# Altium PCB SMPS.PcbDoc
Units mm, origin at the board's own origin, x right, y up, seen from the top; angles counter-clockwise.
Board outline 45.21 x 35.05 mm, 2 copper layers (Top Layer, Bottom Layer); 18 components, 13 nets, 62 pads, 61 vias.
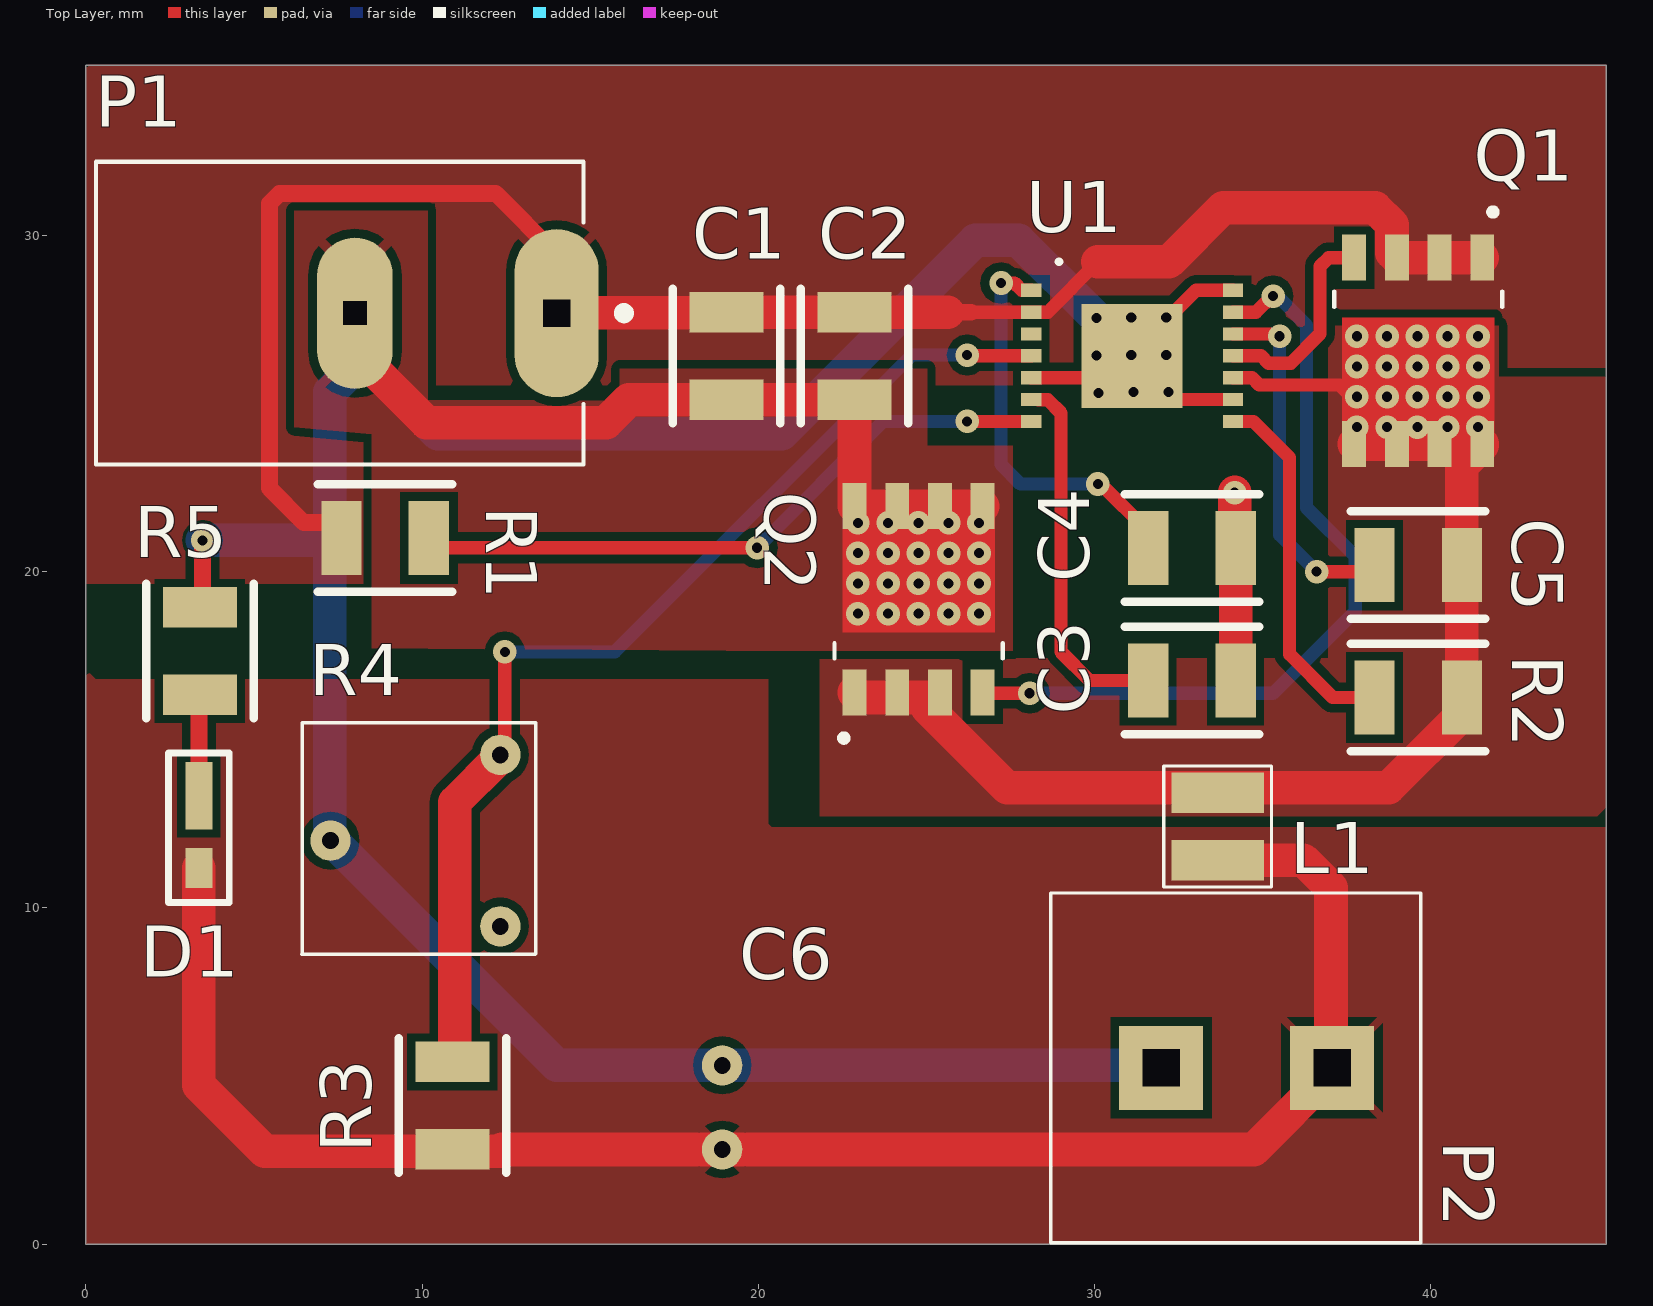
[diagram p0: Top Layer view]
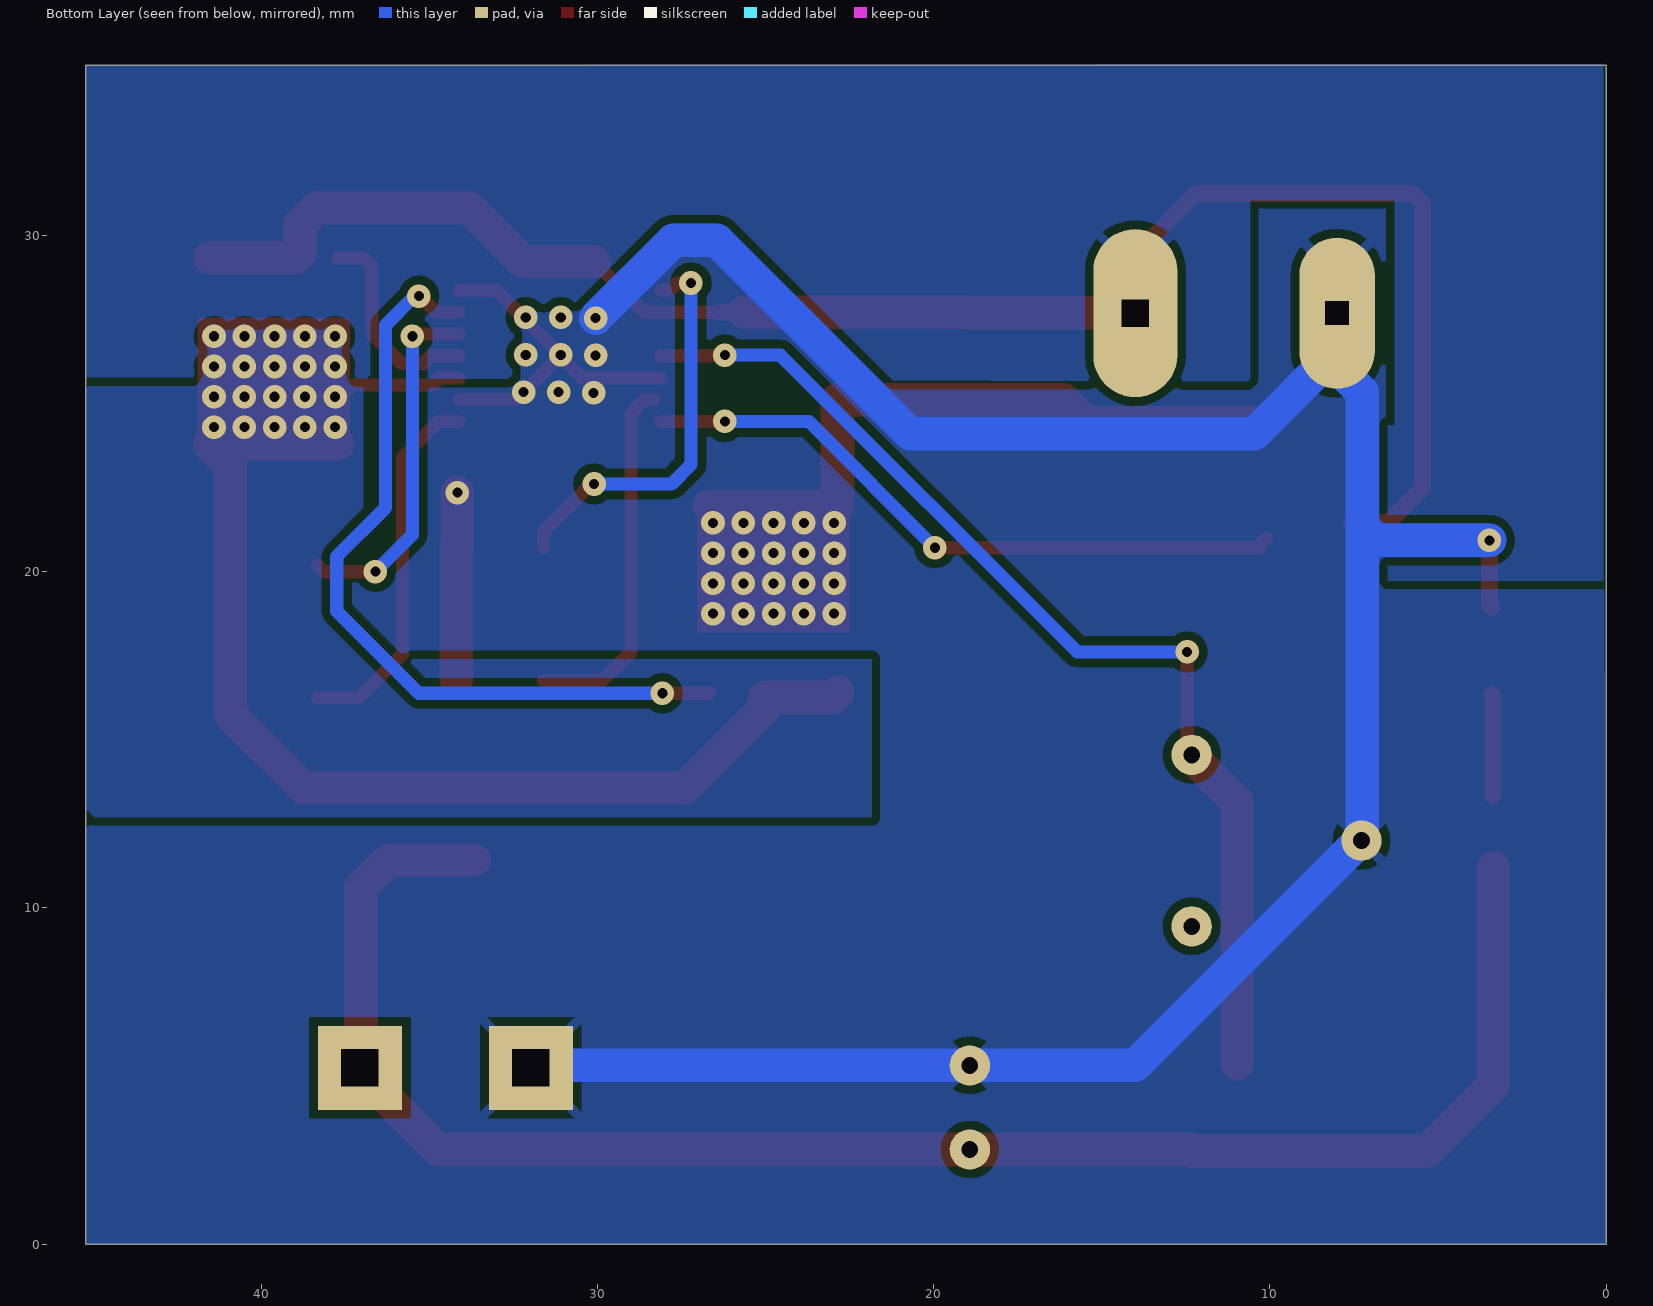
[diagram p1: Bottom Layer view, seen from below]
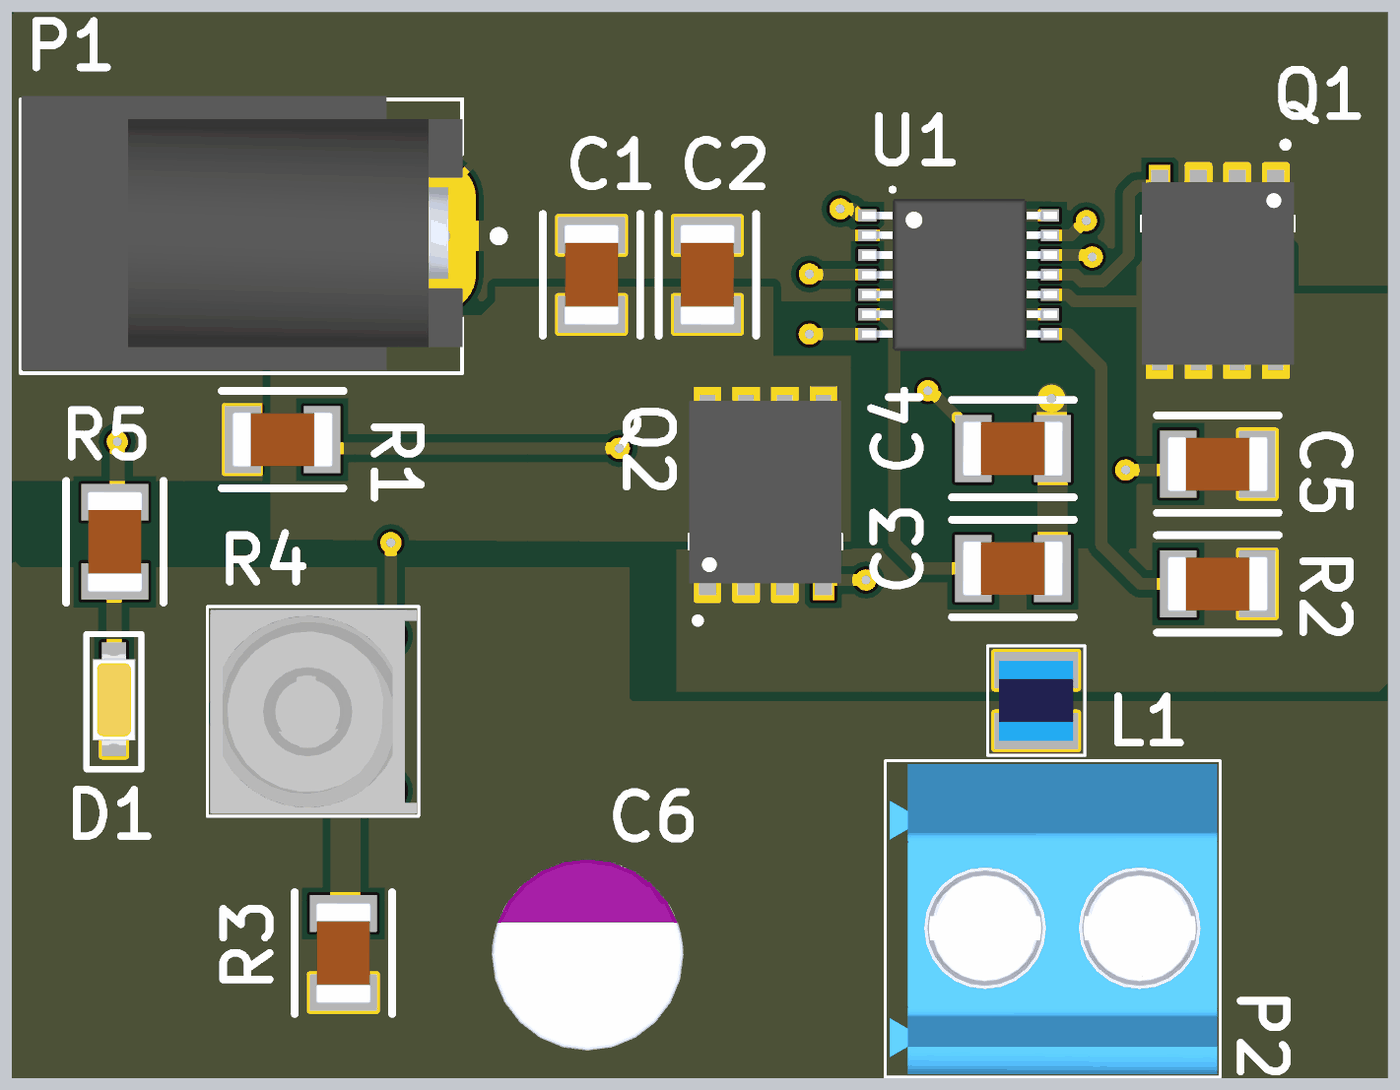
[diagram p2: 3D render of the assembled board from above, using the file's embedded part models]

## Layer stack, top to bottom
Top Solder: solder mask 0.0102, Solder Resist, Dk 3.5
Top Layer: signal copper 0.0356
Dielectric 1: dielectric 0.32, FR-4, Dk 4.8
Bottom Layer: signal copper 0.0356
Bottom Solder: solder mask 0.0102, Solder Resist, Dk 3.5

## Board outline
0,0 45.212,0 45.212,35.052 0,35.052

## Design rules (kind name [scope] priority, off if disabled: settings)
Clearance Clearance_1 [All] p1: gap=0.254 ignorepadtopadclearanceinfootprint=FALSE except(0: Arc-Hole Track-Hole SMDPad-Hole THPad-Hole Via-Hole Fill-Hole Poly-Hole Region-Hole Text-Hole)
ComponentClearance [All] p1: gap=0.254 collisioncheckmode=3 verticalgap=2540 showdistances=FALSE
HoleSize [All] p1: absolutevalues=TRUE maxlimit=3.5 minlimit=0.3 maxpercent=80.000 minpercent=20.000
MinimumAnnularRing [All] p1: minimumring=0.2
PolygonConnect GND_HeatSink [InNet('GND') vs InNet('GND')] p1: thpad.connectstyle=Relief thpad.reliefconductorwidth=0.3 thpad.reliefentries=4 thpad.polygonreliefangle="45 Angle" thpad.airgapwidth=0.254 smdpad.connectstyle=Direct smdpad.reliefconductorwidth=0.254 smdpad.reliefentries=4 smdpad.polygonreliefangle="90 Angle" smdpad.airgapwidth=0.254 via.connectstyle=Direct via.reliefconductorwidth=0.254 via.reliefentries=4 via.polygonreliefangle="90 Angle" via.airgapwidth=0.254
PolygonConnect NetC5_1_HeatSink [InNet('NetC5_1') vs InNet('NetC5_1')] p2: connectstyle=Direct reliefconductorwidth=0.254 reliefentries=4 polygonreliefangle="90 Angle" airgapwidth=0.254
PolygonConnect [All] p3: thpad.connectstyle=Relief thpad.reliefconductorwidth=0.254 thpad.reliefentries=4 thpad.polygonreliefangle="45 Angle" thpad.airgapwidth=0.254 smdpad.connectstyle=Direct smdpad.reliefconductorwidth=0.254 smdpad.reliefentries=4 smdpad.polygonreliefangle="90 Angle" smdpad.airgapwidth=0.254 via.connectstyle=Relief via.reliefconductorwidth=0.254 via.reliefentries=4 via.polygonreliefangle="90 Angle" via.airgapwidth=0.254
RoutingVias [All] p1: holewidth=0.4 width=0.8 viastyle="Through Hole" minholewidth=0.3 minwidth=0.7 maxholewidth=0.5 maxwidth=0.9
SolderMaskExpansion [All] p1: expansion=0.102
UnRoutedNet [All] p1: checkbadconnections=TRUE
UnpouredPolygon [All] p1: allowunpoured=TRUE allowshelved=TRUE
Width [All] p1: maxlimit=1 minlimit=0.2 preferedwidth=0.5
26 further rules are at their usual default settings.

## Components (designator, comment, footprint, x,y, rotation, side; value= is the part's Value field where it differs from the comment)
C1 "10uF" 1206 19.05,26.416 r90 top
C2 "0.1uF" 1206 22.86,26.416 r90 top
C3 "10uF" 1206 32.893,16.764 r180 top
C4 "2.2uF" 1206 32.893,20.701 r0 top
C5 "470nF" 1206 39.624,20.193 r180 top
C6 "4700uF" 2SEPC390M+TSS 18.923,4.064 r90 top
D1 "158301260" LED 3.36,12.26 r180 top
L1 "4.7uH" LQW2UAS4R7J00L 33.66,12.42 r270 top
P1 "PJ-037AH" power 14.001,27.686 r180 top
P2 "102-6179-ND" Output 39.6,0.14 r90 top
Q1 "CSD18540Q5B" CSD18540Q5B 39.624,26.567 r270 top
Q2 "CSD18540Q5B" CSD18540Q5B 24.765,19.177 r90 top
R1 "140KΩ" 1206 8.9,21 r180 top
R2 "140KΩ" 1206 39.624,16.256 r0 top
R3 "75kΩ" 1206 10.9,4.12 r270 top
R4 "20kΩ" TOP_ADJ 9.8,12 r0 top
R5 "330Ω" 1206 3.39,17.64 r270 top
U1 "LM3150MH/NOPB" LM3150MH/NOPB 31.115,26.416 r0 top

## Footprints (in the part's own frame and the unit in brackets; to place one, negate y for a bottom-side part, rotate by r counter-clockwise, add the part's x,y. Pads: shape width x height; smd on the part's side, far side on the other; paste and mask are expansions set on the pad)
2SEPC390M+TSS [mm]
  round 1.2 hole 0.5: 1(-1.25,0) 2(1.25,0)
  body extent -3.15,-3.15 3.15,3.15, height 14
1206 [mm]
  rect 1.2x2.2 smd: 1(-1.3,0) 2(1.3,0)
  silkscreen extent -2,-1.6 2,1.6, body extent -1.65,-0.9 1.65,0.9, height 1.6
CSD18540Q5B [mm]
  rect 1.372x0.71 smd paste-2: 1(-2.77,-1.905) 2(-2.77,1.905) 2(-2.77,-0.635) 2(-2.77,0.635)
  rect 1.372x0.71 smd paste-2 mask+0: 3(2.77,1.905) 3(2.77,-0.635) 3(2.77,0.635) 3(2.77,-1.905)
  Top Layer region: 2.866,-2.26 -0.984,-2.26 -0.984,2.26 2.866,2.26
  silkscreen extent -4.23,-2.5 -1.3,2.5, body extent -2.9,-2.5 3.1,2.5, height 1.05
LED [mm] "158301260"
  rect 0.8x2 smd: 1(0,-1.075)
  rect 0.8x1.2 smd: 2(0,1.075)
  silkscreen extent -0.9,-2.34 0.9,2.1, body extent -0.7,-1.69 0.7,1.31, height 0.8
LM3150MH/NOPB [mm]
  rect 0.6x0.395 smd: 1(-3,1.95) 2(-3,1.3) 3(-3,0.65) 4(-3,0) 5(-3,-0.65) 5(3,-1.3) 6(-3,-1.3) 7(-3,-1.95) 8(3,-1.95) 10(3,-0.65) 11(3,0) 12(3,0.65) 13(3,1.3) 14(3,1.95)
  rect 3x3.1 smd: 15(0,0)
  silkscreen extent -2.18,2.8 -2.17,2.8, body extent -3.17,-2.5 3.23,2.5, height 1.2
LQW2UAS4R7J00L [mm]
  rect 1.2x2.75 smd: 1(-1,0) 2(1,0)
  silkscreen extent -1.8,-1.6 1.8,1.6, body extent -1.31,-1.22 1.31,1.23, height 2.03
Output [mm] "102-6179-ND"
  rect 2.5x2.5 hole 1.1 square: 1(5.1,2.54) 2(5.1,7.62)
  silkscreen extent -0.1,-0.1 10.3,10.9, body extent 0,0 10.2,10.76, height 14.1
power [mm] "PJ-037AH"
  oval 2.5x5 hole 0.8 square: 1(0,0)
  oval 2.25x4.5 hole 0.7 square: 2(6,0)
  silkscreen extent -2.15,-4.5 13.7,4.5, body extent -0.82,-4.6 13.68,4.4, height 12
TOP_ADJ [mm] "3360Y-1-503LF"
  round 1.2 hole 0.5: 1(2.525,2.55) 2(-2.525,0) ""(2.525,-2.55)
  silkscreen extent -3.37,-3.38 3.57,3.51, body extent -3.27,-3.3 3.51,3.41, height 18.56

## Part data
C1 C3: library part Capacitor, "CAP CER 10UF 25V X5R 1206", MF="AVX Corporation", PN=12063D106KAT2A
C2: library part Capacitor, "CAP CER 0.1UF 50V X7R 1206", MF="AVX Corporation", PN=12065C104KAT2A
C4: library part Capacitor, "CAP CER 2.2UF 25V X7R 1206", MF="AVX Corporation", PN=12063C225K4Z2A
C5: library part Capacitor, "CAP CER 0.47UF 50V Z5U 1206", MF="AVX Corporation", PN=12065E474MAT2A
C6: library part 2SEPC390M+TSS, "CAP ALUM POLY 390UF 20% 2.5V T/H", MF="Panasonic Electronic Components", PN=2SEPC390M+TSS
D1: library part LED158301260, "LED WL-SWTP COOL WHT 6000K 1206", MF="Würth Elektronik", PN=158301260
L1: library part Inductor, "FIXED IND 4.7UH 260MA 4 OHM SMD", MF="Murata Electronics", PN=LQW2UAS4R7J00L
P1: library part Power_connector, "CONN PWR JACK 2X5.5MM SOLDER", MF="CUI Devices", PN=PJ-037AH
P2: library part Output, "TERMINAL BLOCK, SCREW TYPE, 5.08", MF="CUI Devices", PN=TB004-508-02BE
Q1 Q2: "MOSFET N-CH 60V 100A 8VSON", MF="Texas Instruments", PN=CSD18540Q5B
R1 R2: library part Resistor, "RES SMD 140K OHM 0.5% 1/4W 1206", MF=YAGEO, PN=RT1206DRD07140KL
R3: library part Resistor, "RES SMD 75K OHM 0.5% 1/4W 1206", MF=YAGEO, PN=RT1206DRD0775KL
R4: library part "Variable Resistor", "POT 50K OHM 1/4W PLASTIC LINEAR", MF="Bourns Inc.", PN=3360Y-1-503LF
R5: library part Resistor, "RES SMD 330 OHM 0.5% 1/4W 1206", MF=YAGEO, PN=RT1206DRE07330RL
U1: "IC REG CTRLR BUCK 14TSSOP", MF="Texas Instruments", PN=LM3150MH/NOPB

## Via types
v1: diameter 0.7, hole 0.3, Top Layer to Bottom Layer, 61 vias

## Nets (pads, with @x,y where several pads share a name; then routed paths per layer and width w, separated by ;. In a path a pad name is that pad's centre, name@x,y a point inside that pad or via, vN(x,y) a via of type N, cw(c..) or ccw(c..) an arc to the next point about the centre after c; other vN are vias at no path point)
+5: C6.1 D1.2 L1.2 P2.1 R3.2 | length 51.1
  Top Layer w1: D1.2 3.36,4.72 5.316,2.764 12.319,2.764 12.369,2.814 C6.1 34.734,2.814 37.03,5.11 37.03,10.6 36.21,11.42 L1.2
+12: C1.2 C2.2 P1.1 Q1.2 R1.2 U1.2 | length 52.1
  Top Layer w0.395: 26.319,27.716 U1.2 28.605,27.716 30.099,29.21
  Top Layer w0.5: R1.2@7.59,21.463 6.477,21.463 5.461,22.479 5.461,30.949 5.754,31.242 12.192,31.242 14.001,29.433 P1.1 ; 25.624,27.716 26.319,27.716
  Top Layer w1: P1.1 14.016,27.701 19.035,27.701 C1.2 C2.2 25.624,27.716 ; 30.099,29.21 32.21,29.21 33.821,30.82 38.343,30.82 38.844,30.319 38.844,29.482 38.989,29.337 40.259,29.337 Q1.2@41.529,29.337
GND: C1.1 C2.1 C3.1 C4.2 C6.2 P1.2 P2.2 Q2.3 R4.2 R5.1 U1.5 U1.14 U1.15 | length 116.2
  Top Layer w0.395: U1.5@28.115,25.766 30.465,25.766 U1.15 ; U1.5@34.115,25.116 32.415,25.116 v1(32.194,25.336) U1.15 ; U1.14 33.015,28.366 31.115,26.466 U1.15
  Top Layer w0.5: R5.1 3.47,19.02 v1(3.47,20.93)
  Top Layer w1: P1.2 8.001,26.561 10.13,24.432 15.468,24.432 16.152,25.116 C1.1 C2.1 22.86,21.947 24.13,21.947 25.4,21.947 Q2.3@26.67,21.947 ; v1(34.163,22.352) 34.163,20.731 C4.2 C3.1
  Bottom Layer w1: v1(3.47,20.93) 6.884,20.93 7.254,21.3 ; P1.2 P1.2@8.001,26.561 ; v1(30.05,27.54) 27.74,29.85 26.45,29.85 20.7,24.1 10.462,24.1 P1.2@8.001,26.561 ; P2.2@31.95,5.11 31.746,5.314 C6.2 14.005,5.314 7.254,12.065 7.254,21.3 ; 7.254,21.3 7.254,25.34 8.001,26.087 P1.2@8.001,26.561
  other v1: 22.96,18.75 23.86,18.75 24.76,18.75 25.66,18.75 26.562,18.75 22.96,19.65 23.86,19.65 24.76,19.65 25.66,19.65 26.562,19.65 22.96,20.55 23.86,20.55 24.76,20.55 25.66,20.55 26.562,20.55 22.96,21.45 23.86,21.45 24.76,21.45 25.66,21.45 26.562,21.45 30.114,25.318 31.154,25.336 30.05,26.429 31.091,26.448 32.131,26.448 31.09,27.559 32.131,27.559
NetC3_2: C3.2 U1.6 | length 10.9
  Top Layer w0.395: U1.6@28.321,25.115 28.602,25.115 29,24.717 29,17.609 29.845,16.764 C3.2
NetC4_1: C4.1 U1.1 | length 12.1
  Top Layer w0.395: v1(27.217,28.583) 27.617,28.583 27.834,28.366 U1.1 ; v1(30.099,22.606) 30.188,22.606 31.593,21.201 C4.1
  Bottom Layer w0.395: v1(27.217,28.583) 27.217,23.183 27.794,22.606 v1(30.099,22.606)
NetC5_1: C5.1 L1.1 Q1.3 Q2.2 R2.2 U1.10 | length 37.6
  Top Layer w0.395: U1.10 34.683,25.766 34.899,25.549 37.287,25.549 37.719,25.117 37.719,24.3 Q1.3@37.719,23.797
  Top Layer w1: Q2.2@22.86,16.407 22.86,16.401 23.005,16.256 24.13,16.256 25.019,16.256 25.019,15.951 27.397,13.573 32.258,13.573 38.741,13.573 40.924,15.756 R2.2 C5.1 40.924,23.151 41.529,23.756 41.529,23.797 40.259,23.797 38.989,23.797 Q1.3@37.719,23.797
  other v1: 37.8,24.3 38.7,24.3 39.6,24.3 40.5,24.3 41.402,24.3 37.8,25.2 38.7,25.2 39.6,25.2 40.5,25.2 41.402,25.2 37.8,26.1 38.7,26.1 39.6,26.1 40.5,26.1 41.402,26.1 37.8,27 38.7,27 39.6,27 40.5,27 41.402,27
NetC5_2: C5.2 U1.12 | length 10.7
  Top Layer w0.395: U1.12 35.434,27.066 v1(35.5,27) ; v1(36.6,20) 38.131,20 C5.2
  Bottom Layer w0.395: v1(35.5,27) 35.5,21.1 v1(36.6,20)
NetD1_1: D1.1 R5.2 | length 3
  Top Layer w0.5: D1.1 3.36,16.31 R5.2
NetQ1_1: Q1.1 U1.11 | length 6.2
  Top Layer w0.395: U1.11 34.951,26.416 35.168,26.198 35.832,26.198 36.703,27.07 36.703,29.083 36.957,29.337 Q1.1
NetQ2_1: Q2.1 U1.13 | length 23.9
  Top Layer w0.395: Q2.1 26.694,16.383 v1(28.067,16.383) ; U1.13 34.797,27.716 35.275,28.194 v1(35.306,28.194)
  Bottom Layer w0.395: v1(28.067,16.383) 35.306,16.383 37.747,18.824 37.747,20.451 36.302,21.897 36.302,27.332 35.439,28.194 v1(35.306,28.194)
NetR1_1: R1.1 U1.7 | length 19.7
  Top Layer w0.395: R1.1@10.1,21 10.3,20.8 10.3,20.71 v1(19.96,20.71) ; v1(26.207,24.466) U1.7
  Bottom Layer w0.395: v1(19.96,20.71) 23.716,24.466 v1(26.207,24.466)
NetR2_1: R2.1 U1.8 | length 11
  Top Layer w0.395: U1.8 34.716,24.466 35.798,23.384 35.798,17.542 37.084,16.256 R2.1
NetR3_1: R3.1 R4.1 U1.4 | length 32.5
  Top Layer w0.395: R4.1@12.304,14.615 12.09,14.615 12.46,14.985 v1(12.46,17.61) ; v1(26.21,26.44) 26.233,26.417 28.112,26.417 U1.4 U1.4
  Top Layer w1: R3.1@10.971,5.371 10.971,13.142 12.304,14.475 R4.1@12.304,14.615
  Bottom Layer w0.395: v1(12.46,17.61) 15.727,17.61 24.557,26.44 v1(26.21,26.44)
pads on no net: R4. U1.3

## Polygon pours and split planes (outlines as drawn)
+5 on Top Layer "+5_L01_P044" (solid, remove dead copper, pour order 44): 45.2,0 45.2,12.4 20.4,12.4 20.3,12.5 20.3,16.8 0.3,16.8 0,17.1 0,0
GND on Top Layer "GND_L01_P004" (solid, remove dead copper, pour order 4): 6.2,31 10.16,31 10.16,29.083 10.16,25.1 15.875,25.082 15.875,26.035 25.019,26.035 25.019,23.749 27.559,23.749 27.559,17.653 21.59,17.653 19.05,17.653 8.509,17.716 8.509,24.086 6.2,24.3
+12 on Top Layer "+12_L01_P040" (solid, remove dead copper, pour order 40): 45.212,35.075 45.212,25.623 10.572,25.623 10.572,31.023 6.272,31.023 6.272,24.323 8.454,24.323 8.454,19.708 5.787,19.708 0.072,19.708 0.072,22.883 0.072,35.075
+12 on Top Layer "+12_L01_P032" (solid, remove dead copper, pour order 32): 45.1,35 45.1,25.548 10.388,25.548 10.388,30.948 6.088,30.948 6.088,24.248 8.27,24.248 8.27,19.633 5.603,19.633 0,19.633 0,35
NetC5_1 on Top Layer "NETC5_1_L01_P018" (solid, remove dead copper, pour order 18): 36.945,27.319 42.025,27.319 42.025,25.8 45.2,25.8 45.2,12.973 44.946,12.719 21.832,12.719 21.832,17.418 36.945,17.418
+12 on Top Layer "+12_L01_P008" (solid, remove dead copper, pour order 8): 3.429,20.447
GND on Bottom Layer "GND_L02_P050" (solid, remove dead copper, pour order 50): 0.088,35.1 45.164,35.1 45.212,35.052 45.2,35.04 45.2,0 0,0
+12 on Bottom Layer "+12_L02_P006" (solid, remove dead copper, pour order 6): 45.212,35.052 45.212,25.781 10.588,25.648 10.588,31.048 6.288,31.048 6.288,24.348 8.47,24.348 8.47,19.733 5.803,19.733 0.088,19.733 0.088,22.908 0.088,35.1
NetC5_1 on Bottom Layer "NETC5_1_L02_P016" (solid, remove dead copper, pour order 16): 36.957,27.6 42.037,27.6 42.037,25.781 45.212,25.781 45.212,12.954 44.958,12.7 21.844,12.7 21.844,17.399 36.957,17.399
no net on Bottom Layer "+12_L01_P-001" (solid, remove dead copper, pour order 48): 0.088,35.1